# Altium PCB 3S_BMS_revised.PcbDoc
Units mm, origin at the board's own origin, x right, y up, seen from the top; angles counter-clockwise.
Board outline 30.73 x 42.55 mm, 2 copper layers (Top Layer, Bottom Layer); 27 components, 18 nets, 83 pads, 4 vias.
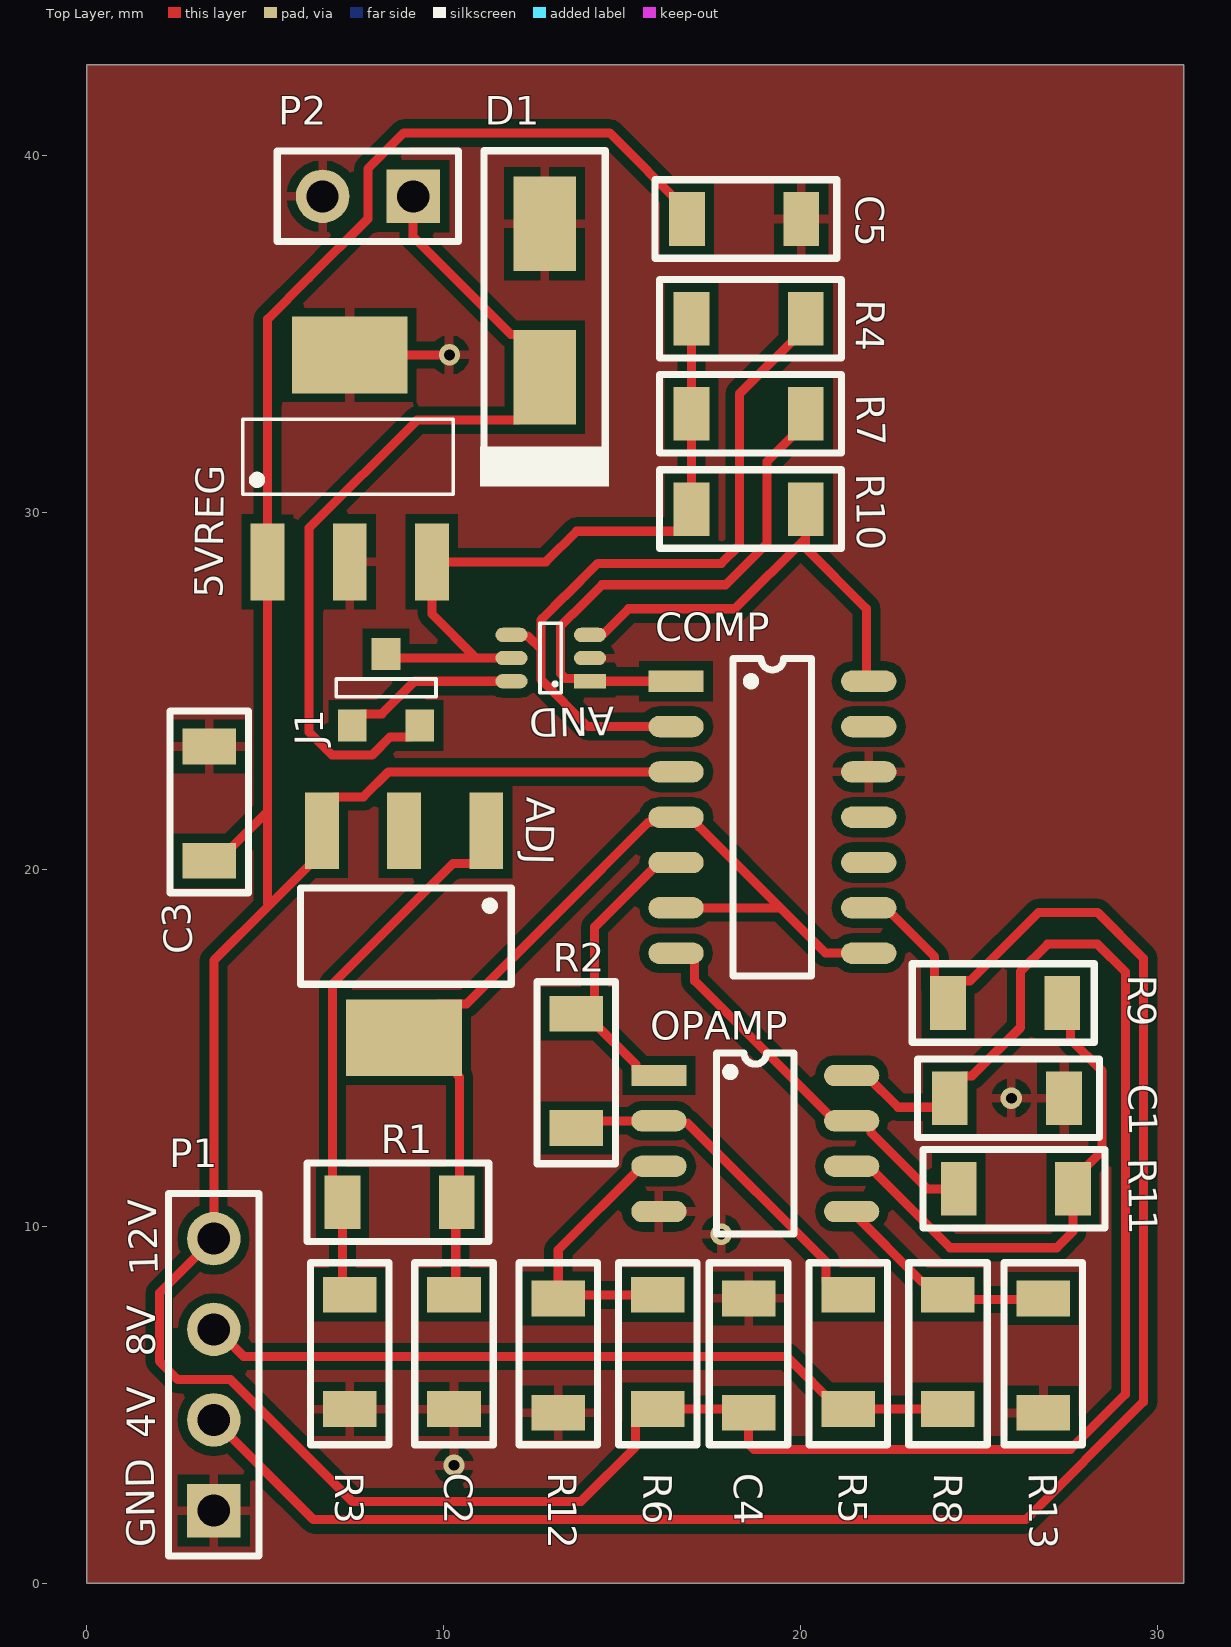
[diagram p0: Top Layer view]
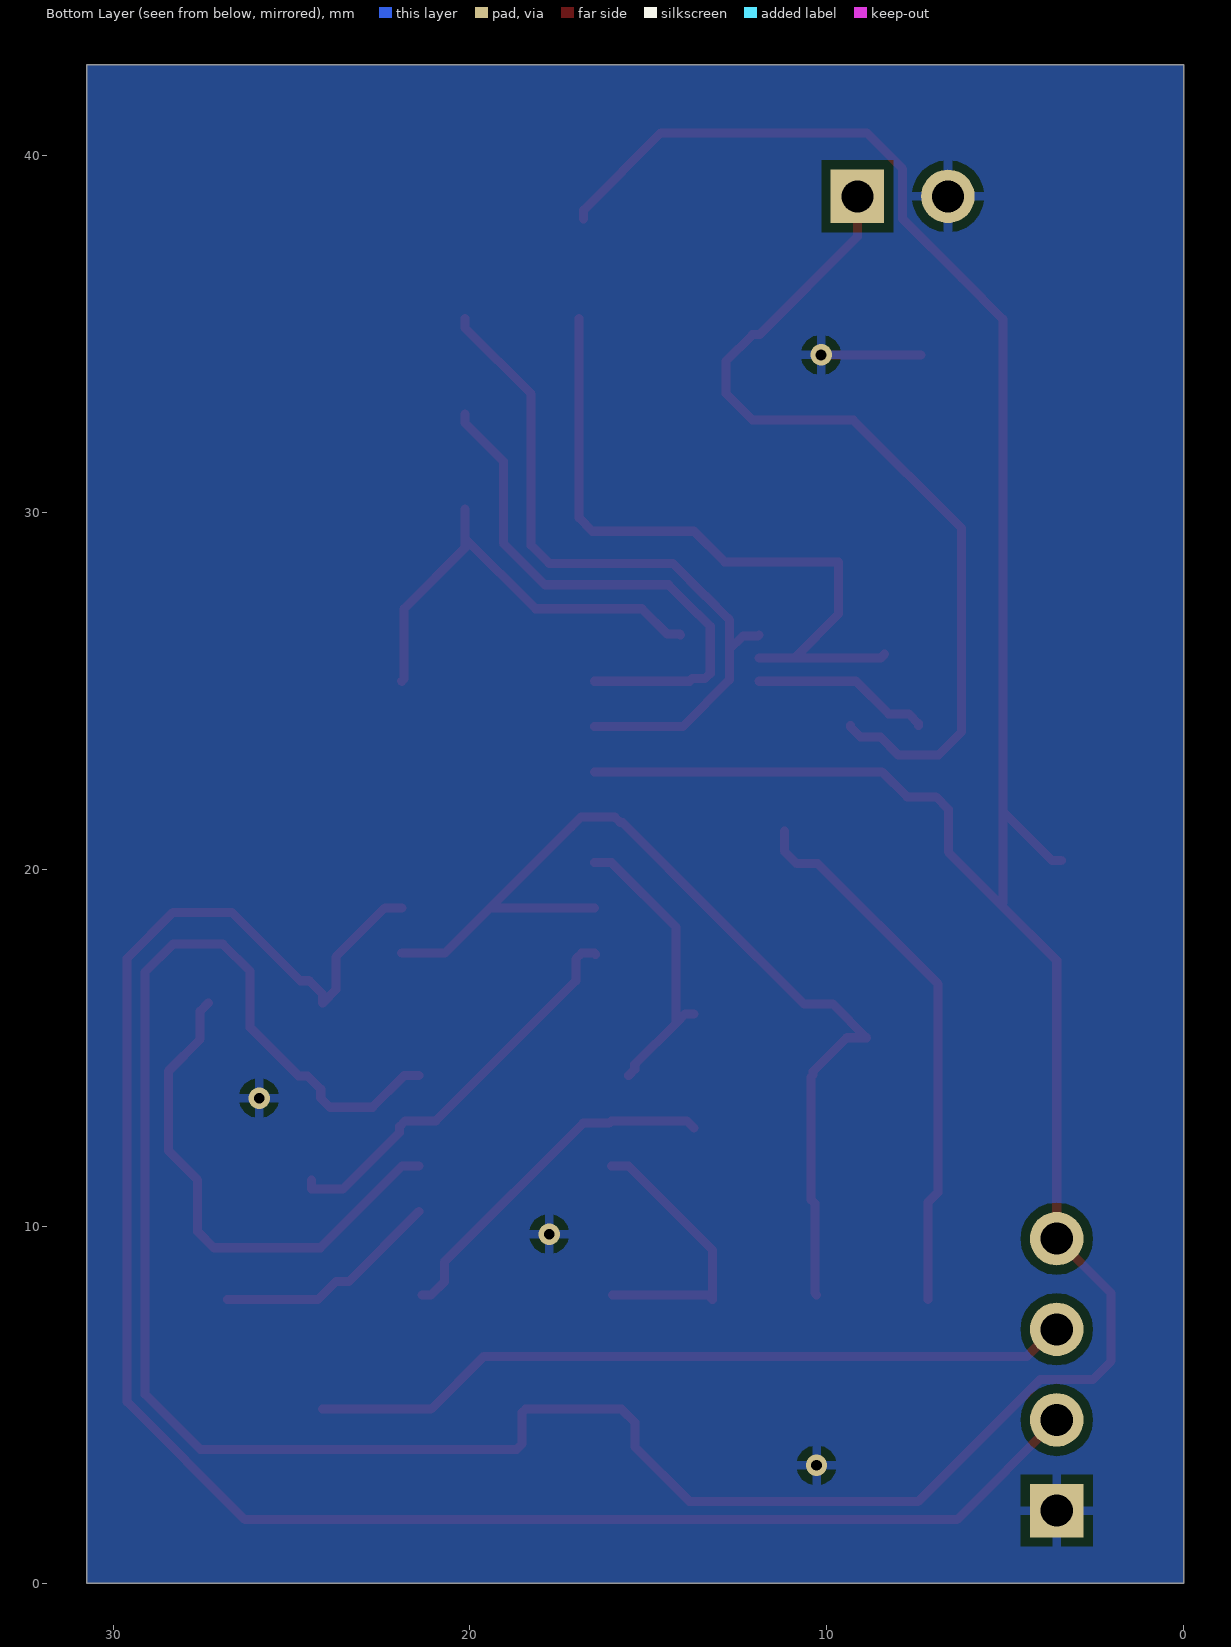
[diagram p1: Bottom Layer view, seen from below]
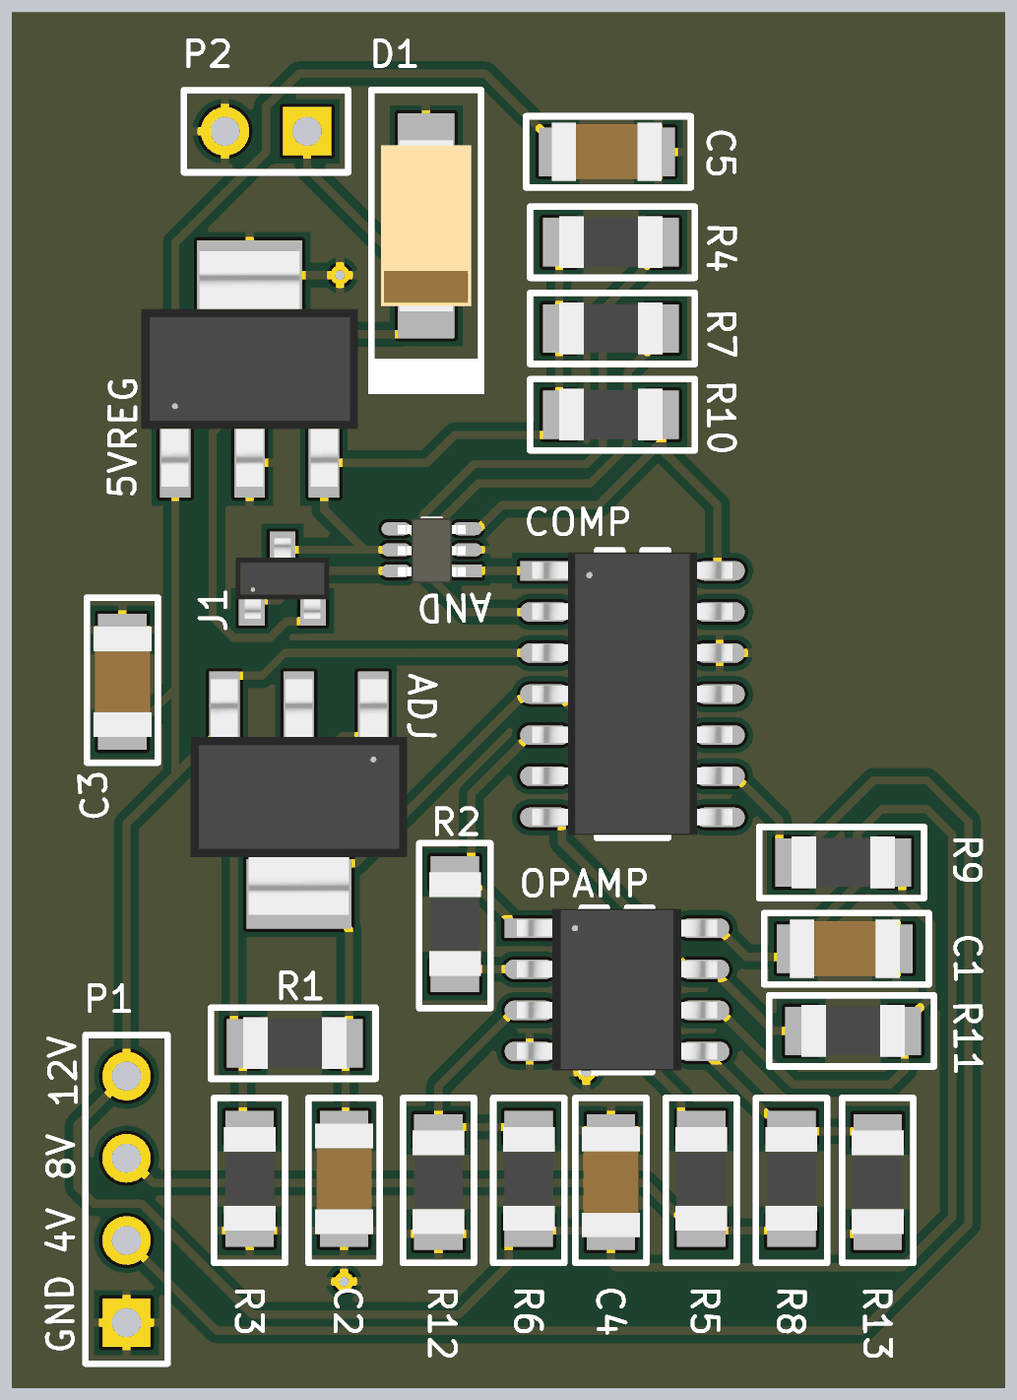
[diagram p2: 3D render of the assembled board from above, using the file's embedded part models]

## Layer stack, top to bottom
Top Solder: solder mask 0.0102, Solder Resist, Dk 3.5
Top Layer: signal copper 0.0356
Dielectric 1: dielectric 0.32, FR-4, Dk 4.8
Bottom Layer: signal copper 0.0356
Bottom Solder: solder mask 0.0102, Solder Resist, Dk 3.5

## Board outline
30.734,42.545 30.734,0 0,0 0,42.545

## Design rules (kind name [scope] priority, off if disabled: settings)
Clearance [All] p1: gap=0.254 ignorepadtopadclearanceinfootprint=FALSE except(0: Arc-Hole Track-Hole SMDPad-Hole THPad-Hole Via-Hole Fill-Hole Poly-Hole Region-Hole Text-Hole)
PolygonConnect [All] p1: connectstyle=Relief reliefconductorwidth=0.254 reliefentries=4 polygonreliefangle="90 Angle" airgapwidth=0.254
RoutingVias [All] p1: holewidth=0.711 width=1.27 viastyle="Through Hole" minholewidth=0.711 minwidth=1.27 maxholewidth=0.711 maxwidth=1.27
SolderMaskExpansion [All] p1: expansion=0.102 istentingtop=FALSE
Width [All] p1: maxlimit=0.254 minlimit=0.254 preferedwidth=0.254
30 further rules are at their usual default settings.

## Components (designator, comment, footprint, x,y, rotation, side; value= is the part's Value field where it differs from the comment)
5VREG "5V REG" 5VREG 7.366,28.617 r0 top
ADJ "ADJ REG" ADJREG 8.89,21.082 r180 top (schematic designator ADJ1)
AND "AND GATE" AND3 14.097,25.273 r180 top (schematic designator AND1)
C1 "0.1uF" C1206 25.781,13.589 r180 top
C2 "1uF" C1206 10.287,6.477 r90 top
C3 "0.1uF" C1206 3.429,21.844 r270 top
C4 "0.1uF" C1206 18.542,6.377 r270 top
C5 "0.1uF" C1206 18.415,38.227 r180 top
COMP "COMPARATOR" Comparator 16.51,25.273 r0 top (schematic designator COMP1)
D1 "Diode" Diode 12.827,35.941 r270 top
J1 "FET" MOSFET 8.382,26.035 r0 top
OPAMP "OP-AMP" "OPAMP 2-Circuit" 16.03,14.224 r0 top (schematic designator OPAMP1)
P1 "Header 4" HDR1X4 3.556,2.032 r90 top
P2 "Relay" HDR1X2 9.144,38.862 r180 top
R1 "330R" R1206 8.763,10.668 r0 top
R2 "1K" R1206 13.716,14.351 r90 top
R3 "620R" R1206 7.366,6.477 r90 top
R4 "47K" R1206 18.542,35.433 r180 top
R5 "1K" R1206 21.336,6.477 r90 top
R6 "1K" R1206 16.002,6.477 r90 top
R7 "47K" R1206 18.542,32.766 r180 top
R8 "1K" R1206 24.13,6.477 r90 top
R9 "1K" R1206 25.73,16.256 r0 top
R10 "47K" R1206 18.542,30.099 r180 top
R11 "1K" R1206 26.035,11.049 r0 top
R12 "1K" R1206 13.208,6.377 r270 top
R13 "1K" R1206 26.797,6.377 r270 top

## Footprints (in the part's own frame and the unit in brackets; to place one, negate y for a bottom-side part, rotate by r counter-clockwise, add the part's x,y. Pads: shape width x height; smd on the part's side, far side on the other; paste and mask are expansions set on the pad)
5VREG [mm]
  rect 0.95x2.15 smd: 1(-2.3,0) 2(0,0) 3(2.3,0)
  rect 3.25x2.15 smd: 4(0,5.8)
  silkscreen extent -3,1.9 2.9,4, body extent -3.35,-0.74 3.35,6.55, height 1.7
ADJREG [mm]
  rect 0.95x2.15 smd: 1(-2.3,0) 2(0,0) 3(2.3,0)
  rect 3.25x2.15 smd: 4(0,5.8)
  silkscreen extent -3,1.6 2.9,4.3, body extent -3.35,-0.84 3.35,6.45, height 1.7
AND3 [mm]
  rect 0.9x0.4 smd: 1(0,0)
  oval 0.9x0.4 smd: 2(0,-0.65) 3(0,-1.3) 4(2.2,-1.3) 5(2.2,-0.65) 6(2.2,0)
  silkscreen extent 0.8,-1.63 1.4,0.33, body extent 0.05,-1.62 2.15,0.38, height 1
C1206 [mm]
  rect 1x1.5 smd: 1(-1.6,0) 2(1.6,0)
  silkscreen extent -2.6,-1.1 2.5,1.1, body extent -1.7,-0.9 1.7,0.9, height 0.88
Comparator [mm]
  rect 1.55x0.6 smd: 1(0,0)
  oval 1.55x0.6 smd: 2(0,-1.27) 3(0,-2.54) 4(0,-3.81) 5(0,-5.08) 6(0,-6.35) 7(0,-7.62) 8(5.4,-7.62) 9(5.4,-6.35) 10(5.4,-5.08) 11(5.4,-3.81) 12(5.4,-2.54) 13(5.4,-1.27) 14(5.4,0)
  silkscreen extent 1.6,-8.25 3.8,0.64, body extent -0.4,-8.17 5.8,0.57, height 1.76
Diode [mm]
  rect 2.65x1.75 smd: 1(2.15,0) 2(-2.15,0)
  silkscreen extent -4.2,-1.8 5.2,1.8, body extent -2.64,-1.4 2.64,1.4, height 2.34
HDR1X2 [mm] "Connector; Header; 2 Position"
  rect 1.5x1.5 hole 0.9: 1(0,0)
  round 1.5 hole 0.9: 2(2.54,0)
  silkscreen extent -1.27,-1.27 3.81,1.27
HDR1X4 [mm] "Connector; Header; 4 Position"
  rect 1.5x1.5 hole 0.9: 1(0,0)
  round 1.5 hole 0.9: 2(2.54,0) 3(5.08,0) 4(7.62,0)
  silkscreen extent -1.27,-1.27 8.89,1.27
MOSFET [mm]
  rect 0.8x0.9 smd: 1(-0.95,-2) 2(0,0) 3(0.95,-2)
  silkscreen extent -1.4,-1.2 1.4,-0.7, body extent -1.45,-2.24 1.45,0.25, height 1.09
"OPAMP 2-Circuit" [mm]
  rect 1.55x0.6 smd: 1(0,0)
  oval 1.55x0.6 smd: 2(0,-1.27) 3(0,-2.54) 4(0,-3.81) 5(5.4,-3.81) 6(5.4,-2.54) 7(5.4,-1.27) 8(5.4,0)
  silkscreen extent 1.61,-4.44 3.79,0.64, body extent -0.4,-4.4 5.8,0.6, height 1.76
R1206 [mm]
  rect 1x1.5 smd: 1(-1.6,0) 2(1.6,0)
  silkscreen extent -2.6,-1.1 2.5,1.1, body extent -1.6,-0.8 1.6,0.8, height 0.71

## Part data
5VREG: library part LM7805MPX/NOPB, "IC REG LINEAR 5V 1.5A SOT223-4", Dropout Voltage=2V, Manufacturer="Texas Instruments", Max Operating Temperature=125°C, Min Operating Temperature=0°C, Quiescent Current=8mA, Supplier Part Number 1=296-44518-1-ND, Category="Voltage Regulators - Linear", Lead Free="Lead Free", Manufacturer Part Number=LM7805MPX/NOPB, Pricing 1="1=1.32000, 10=1.18000, 25=1.12000, 100=0.86000, 250=0.76000, 500=0.72000, 1000=0.56000 (USD)", RoHS=No, Stock 1=3420, Supplier 1=Digi-Key
ADJ: library part LM317DCYR, "TEXAS INSTRUMENTS - LM317DCYR - LINEAR VOLT REG, 1.5A, 1.25V-37V, SOT223", Case/Package=SOT-223, Dropout Voltage=2V, Manufacturer="Texas Instruments", Max Input Voltage=40V, Max Operating Temperature=125°C, Max Output Current=1.5A, Max Output Voltage=37V, Min Input Voltage=4.2V, Min Operating Temperature=0°C, Min Output Voltage=1.25V, Package Quantity=1, Power Supply Rejection Ratio (PSRR)=64dB, Quiescent Current=3.5mA, Reference Voltage=1.3V, Supplier Part Number 1=296-12602-1-ND, Category="Voltage Regulators - Linear", ComponentLink1Description=https://datasheet.ciiva.com/2042/lm317-2042144.pdf?src-supplier=Digi-Key, ComponentLink1URL=https://datasheet.ciiva.com/2042/lm317-2042144.pdf?src-supplier=Digi-Key, ComponentLink2Description=https://datasheet.ciiva.com/4882/slvs044u-120651-4882417.pdf?src-supplier=Mouser, ComponentLink2URL=https://datasheet.ciiva.com/4882/slvs044u-120651-4882417.pdf?src-supplier=Mouser, ComponentLink3Description=https://datasheet.ciiva.com/41458/001014031-da-01-en-ic-reg-adj-1-5a-lm317dcyr-sot-223-4-tid-41458183.pdf?src-supplier=Conrad, ComponentLink3URL=https://datasheet.ciiva.com/41458/001014031-da-01-en-ic-reg-adj-1-5a-lm317dcyr-sot-223-4-tid-41458183.pdf?src-supplier=Conrad, ComponentLink4Description=https://datasheet.ciiva.com/2042/lm317-2042145.pdf?src-supplier=Digi-Key, ComponentLink4URL=https://datasheet.ciiva.com/2042/lm317-2042145.pdf?src-supplier=Digi-Key, ComponentLink5Description=https://datasheet.ciiva.com/2042/lm317-2042146.pdf?src-supplier=Digi-Key, ComponentLink5URL=https://datasheet.ciiva.com/2042/lm317-2042146.pdf?src-supplier=Digi-Key, ComponentLink6Description=https://datasheet.ciiva.com/46385/1885815-46385689.pdf?src-supplier=Element14, ComponentLink6URL=https://datasheet.ciiva.com/46385/1885815-46385689.pdf?src-supplier=Element14, Contact Plating=Tin,Matte, Height=1.6mm, Lead Free="Lead Free", Length=6.5mm, Manufacturer Part Number=LM317DCYR, Mount="Surface Mount", Number of Outputs=1, Number of Pins=4, Number of Regulators=1, Output Current=1.5A, Output Type=Adjustable, Output Voltage=37V, Packaging="Tape and Reel", Polarity=Positive, Pricing 1="1=0.60000, 10=0.52800, 25=0.49600, 100=0.37600, 250=0.32000, 500=0.30400, 1000=0.23200 (USD)", Radiation Hardening=No, REACH SVHC="No SVHC", RoHS=Yes, Stock 1=100644, Supplier 1=Digi-Key, Weight=0.006632oz, Width=3.5mm
AND: library part SN74LVC1G11DCKR, "IC GATE AND 1CH 3-INP SC-70-6", Case/Package=SC, High Level Output Current=-32mA, Low Level Output Current=32mA, Manufacturer="Texas Instruments", Max Operating Temperature=125°C, Max Supply Voltage=5.5V, Min Operating Temperature=-40°C, Min Supply Voltage=1.65V, Package Quantity=1, Quiescent Current=10uA, Supplier Part Number 1=296-18066-1-ND, Category="Logic Gates", ComponentLink1Description=https://datasheet.ciiva.com/4216/901sn74lvc1g11-4216653.pdf?src-supplier=Arrow, ComponentLink1URL=https://datasheet.ciiva.com/4216/901sn74lvc1g11-4216653.pdf?src-supplier=Arrow, ComponentLink2Description=https://datasheet.ciiva.com/34301/756561-34301472.pdf?src-supplier=Jameco, ComponentLink2URL=https://datasheet.ciiva.com/34301/756561-34301472.pdf?src-supplier=Jameco, ComponentLink3Description=https://datasheet.ciiva.com/15090/getdatasheetpartid-173081-15090972.pdf?src-supplier=Verical, ComponentLink3URL=https://datasheet.ciiva.com/15090/getdatasheetpartid-173081-15090972.pdf?src-supplier=Verical, ComponentLink4Description=https://datasheet.ciiva.com/14290/sn74lvc1g11-14290749.pdf?src-supplier=Avnet, ComponentLink4URL=https://datasheet.ciiva.com/14290/sn74lvc1g11-14290749.pdf?src-supplier=Avnet, ComponentLink5Description=https://datasheet.ciiva.com/1864/sn74lvc1g11-1864149.pdf?src-supplier=Digi-Key, ComponentLink5URL=https://datasheet.ciiva.com/1864/sn74lvc1g11-1864149.pdf?src-supplier=Digi-Key, ComponentLink6Description=https://datasheet.ciiva.com/1864/sn74lvc1g11-1864150.pdf?src-supplier=Digi-Key, ComponentLink6URL=https://datasheet.ciiva.com/1864/sn74lvc1g11-1864150.pdf?src-supplier=Digi-Key, ComponentLink7Description=https://datasheet.ciiva.com/1864/sn74lvc1g11-1864151.pdf?src-supplier=Digi-Key, ComponentLink7URL=https://datasheet.ciiva.com/1864/sn74lvc1g11-1864151.pdf?src-supplier=Digi-Key, ComponentLink8Description=https://datasheet.ciiva.com/26218/sn74lvc1g11-26218392.pdf?src-supplier=Avnet+Europe, ComponentLink8URL=https://datasheet.ciiva.com/26218/sn74lvc1g11-26218392.pdf?src-supplier=Avnet+Europe, ComponentLink9Description=https://datasheet.ciiva.com/7783/sn74lvc1g11-7783449.pdf?src-supplier=Element14, ComponentLink9URL=https://datasheet.ciiva.com/7783/sn74lvc1g11-7783449.pdf?src-supplier=Element14, ComponentLink10Description=https://datasheet.ciiva.com/28695/1882071-28695898.pdf?src-supplier=Element14, ComponentLink10URL=https://datasheet.ciiva.com/28695/1882071-28695898.pdf?src-supplier=Element14, ComponentLink11Description=https://datasheet.ciiva.com/46439/1856273-46439162.pdf?src-supplier=Element14, ComponentLink11URL=https://datasheet.ciiva.com/46439/1856273-46439162.pdf?src-supplier=Element14, ComponentLink12Description=https://datasheet.ciiva.com/46439/1856273-46439210.pdf?src-supplier=Element14, ComponentLink12URL=https://datasheet.ciiva.com/46439/1856273-46439210.pdf?src-supplier=Element14, Contact Plating=Gold, Height=0.9mm, Lead Free="Lead Free", Length=2mm, Logic Function=AND, Manufacturer Part Number=SN74LVC1G11DCKR, Mount="Surface Mount", Number of Bits=1, Number of Circuits=1, Number of Elements=1, Number of Gates=1, Number of Input Lines=3, Number of Inputs=3, Number of Output Lines=1, Number of Outputs=1, Number of Pins=6, Output Current=32mA, Packaging="Tape and Reel", Pricing 1="1=0.43000, 10=0.32000, 25=0.28000, 100=0.18120, 250=0.15000, 500=0.12000, 1000=0.09200 (USD)", Propagation Delay=3.5ns, Radiation Hardening=No, REACH SVHC="No SVHC", RoHS=Yes, Schmitt Trigger Input=No, Stock 1=75205, Supplier 1=Digi-Key, Turn-On Delay Time=4.9ns, Weight=8.8E-05oz, Width=1.25mm
C1 C3 C4 C5: library part C1206C104K5RAC-TU, "Kemet 0.1µF ±10% 50V dc X7R Dielectric SMD Ceramic Multilayer Capacitor; 1206 pa", Capacitance=100nF, Case Code (Imperial)=1206, Case Code (Metric)=3216, Dielectric=X7R, Dielectric Material=Ceramic, Manufacturer=KEMET, Max Operating Temperature=125°C, Min Operating Temperature=-55°C, Package Quantity=4000, Supplier Part Number 1=399-C1206C104K5RAC7800CT-ND, Tolerance=10%, Voltage=50V, Case/Package=1206, Category="Ceramic Capacitors", ComponentLink1Description=https://datasheet.ciiva.com/6125/1725438-6125494.pdf?src-supplier=Farnell, ComponentLink1URL=https://datasheet.ciiva.com/6125/1725438-6125494.pdf?src-supplier=Farnell, ComponentLink2Description=https://datasheet.ciiva.com/6125/kem-c1002-x7r-smd-6125493.pdf?src-supplier=Farnell, ComponentLink2URL=https://datasheet.ciiva.com/6125/kem-c1002-x7r-smd-6125493.pdf?src-supplier=Farnell, ComponentLink3Description=https://datasheet.ciiva.com/14584/70095383-14584998.pdf?src-supplier=Allied+Electronics, ComponentLink3URL=https://datasheet.ciiva.com/14584/70095383-14584998.pdf?src-supplier=Allied+Electronics, ComponentLink4Description=https://datasheet.ciiva.com/6094/kem-c1002-x7r-smd-6094137.pdf?src-supplier=Farnell, ComponentLink4URL=https://datasheet.ciiva.com/6094/kem-c1002-x7r-smd-6094137.pdf?src-supplier=Farnell, ComponentLink5Description=https://datasheet.ciiva.com/14589/70095383-14589050.pdf?src-supplier=Allied+Electronics, ComponentLink5URL=https://datasheet.ciiva.com/14589/70095383-14589050.pdf?src-supplier=Allied+Electronics, ComponentLink6Description=https://datasheet.ciiva.com/7729/1851736-7729804.pdf?src-supplier=Element14, ComponentLink6URL=https://datasheet.ciiva.com/7729/1851736-7729804.pdf?src-supplier=Element14, ComponentLink7Description=https://datasheet.ciiva.com/7730/kem-c1002-x7r-smd-7730076.pdf?src-supplier=Element14, ComponentLink7URL=https://datasheet.ciiva.com/7730/kem-c1002-x7r-smd-7730076.pdf?src-supplier=Element14, ComponentLink8Description=https://datasheet.ciiva.com/7729/1851736-7729805.pdf?src-supplier=Element14, ComponentLink8URL=https://datasheet.ciiva.com/7729/1851736-7729805.pdf?src-supplier=Element14, ComponentLink9Description=https://datasheet.ciiva.com/7730/kem-c1002-x7r-smd-7730077.pdf?src-supplier=Element14, ComponentLink9URL=https://datasheet.ciiva.com/7730/kem-c1002-x7r-smd-7730077.pdf?src-supplier=Element14, ComponentLink10Description=https://datasheet.ciiva.com/32426/slceramic-chip-condensers-e-32426463.pdf?src-supplier=Distrelec, ComponentLink10URL=https://datasheet.ciiva.com/32426/slceramic-chip-condensers-e-32426463.pdf?src-supplier=Distrelec, ComponentLink11Description=https://datasheet.ciiva.com/5423/kem-c1002-x7r-smd-5423254.pdf?src-supplier=Mouser, ComponentLink11URL=https://datasheet.ciiva.com/5423/kem-c1002-x7r-smd-5423254.pdf?src-supplier=Mouser, ComponentLink12Description=https://datasheet.ciiva.com/28682/1851736-28682249.pdf?src-supplier=Element14, ComponentLink12URL=https://datasheet.ciiva.com/28682/1851736-28682249.pdf?src-supplier=Element14, Contact Plating=Tin,Matte, Depth=1.6mm, Height=0.78mm, Length=3.2mm, Manufacturer Part Number=C1206C104K5RAC-TU, Mount="Surface Mount", Number of Pins=2, Packaging="Tape and Reel", Pricing 1="1=0.12000, 10=0.08400, 50=0.04760, 100=0.03950, 500=0.02768, 1000=0.02291 (USD)", Radiation Hardening=No, REACH SVHC="No SVHC", RoHS=Yes, Stock 1=1706426, Supplier 1=Digi-Key, Termination=SMD/SMT, Voltage Rating=50V, Voltage Rating (DC)=50V, Width=1.6mm
C2: library part C1206C105M4RACTU, "KEMET         C1206C105M4RACTU             SMD Multilayer Ceramic Capacitor, 1206 [3216 Metric], 1 F, 16 V,  20%, X7R, C Series                          New", Case Code (Imperial)=1206, Case Code (Metric)=3216, Dielectric=X7R, Dielectric Material=Ceramic, Manufacturer=KEMET, Max Operating Temperature=125°C, Min Operating Temperature=-55°C, Package Quantity=1, Supplier Part Number 1=399-8150-1-ND, Tolerance=20%, Voltage Rating=16V, Capacitance=1uF, Case/Package=1206, Category="Ceramic Capacitors", ComponentLink1Description=http://components.arrow.com/part/dataview/0323_00341530?src-supplier=Arrow+Europe, ComponentLink1URL=http://components.arrow.com/part/dataview/0323_00341530?src-supplier=Arrow+Europe, ComponentLink2Description=http://www.farnell.com/datasheets/2746114.pdf?src-supplier=Farnell, ComponentLink2URL=http://www.farnell.com/datasheets/2746114.pdf?src-supplier=Farnell, ComponentLink3Description=http://www.mouser.com/ds/2/212/KEM_C1002_X7R_SMD-1102033.pdf?src-supplier=Mouser, ComponentLink3URL=http://www.mouser.com/ds/2/212/KEM_C1002_X7R_SMD-1102033.pdf?src-supplier=Mouser, ComponentLink4Description=http://www.farnell.com/datasheets/2746114.pdf?src-supplier=Newark, ComponentLink4URL=http://www.farnell.com/datasheets/2746114.pdf?src-supplier=Newark, ComponentLink5Description=http://www.farnell.com/datasheets/1828800.pdf?src-supplier=Newark, ComponentLink5URL=http://www.farnell.com/datasheets/1828800.pdf?src-supplier=Newark, ComponentLink6Description=https://api.kemet.com/component-edge/download/datasheet/C1206C105M4RACTU.pdf?src-supplier=Digi-Key, ComponentLink6URL=https://api.kemet.com/component-edge/download/datasheet/C1206C105M4RACTU.pdf?src-supplier=Digi-Key, ComponentLink7Description=http://components.arrow.com/part/dataview/2096582S3494707N7429?src-supplier=Arrow, ComponentLink7URL=http://components.arrow.com/part/dataview/2096582S3494707N7429?src-supplier=Arrow, ComponentLink8Description=https://search.kemet.com/component-edge/download/datasheet/C1206C105M4RACTU.pdf?src-supplier=Digi-Key, ComponentLink8URL=https://search.kemet.com/component-edge/download/datasheet/C1206C105M4RACTU.pdf?src-supplier=Digi-Key, ComponentLink9Description=https://www.verical.com/server-webapp/html/getDatasheet?partID=110809&src-supplier=Verical, ComponentLink9URL=https://www.verical.com/server-webapp/html/getDatasheet?partID=110809&src-supplier=Verical, ComponentLink10Description=http://www.farnell.com/datasheets/2065007.pdf?src-supplier=Element14, ComponentLink10URL=http://www.farnell.com/datasheets/2065007.pdf?src-supplier=Element14, Depth=1.6mm, Height=1.2mm, Length=3.2mm, Manufacturer Part Number=C1206C105M4RACTU, Mount="Surface Mount", Packaging="Tape and Reel", Pricing 1="1=0.19000, 10=0.12600, 50=0.07560, 100=0.06390, 500=0.04372, 1000=0.03868 (USD)", Radiation Hardening=No, REACH SVHC="No SVHC", RoHS=Yes, Stock 1=36978, Supplier 1=Digi-Key, Termination=SMD/SMT, Thickness=0.055inch, Voltage Rating (DC)=16V, Width=0.063inch
COMP: library part LM339DR, "Comparator Quad 15V/30V 14-Pin SOIC T/R", Case/Package=SOIC, Input Bias Current=250nA, Input Offset Voltage (Vos)=5mV, Manufacturer="Texas Instruments", Max Dual Supply Voltage=15V, Max Operating Temperature=70°C, Max Supply Current=500uA, Max Supply Voltage=30V, Min Dual Supply Voltage=1V, Min Operating Temperature=0°C, Min Supply Voltage=2V, Nominal Supply Current=2mA, Output Current=20mA, Output Current per Channel=6mA, Package Quantity=2500, Quiescent Current=2.5mA, Supplier Part Number 1=296-1013-1-ND, Voltage Gain=106.02dB, Category="Amplifiers - Op Amps, Buffer, Instrumentation", ComponentLink1Description=https://datasheet.ciiva.com/15131/getdatasheetpartid-242797-15131064.pdf?src-supplier=Verical, ComponentLink1URL=https://datasheet.ciiva.com/15131/getdatasheetpartid-242797-15131064.pdf?src-supplier=Verical, ComponentLink2Description=https://datasheet.ciiva.com/34301/902741-34301710.pdf?src-supplier=Jameco, ComponentLink2URL=https://datasheet.ciiva.com/34301/902741-34301710.pdf?src-supplier=Jameco, ComponentLink3Description=https://datasheet.ciiva.com/2970/lm2901-2970486.pdf?src-supplier=Avnet, ComponentLink3URL=https://datasheet.ciiva.com/2970/lm2901-2970486.pdf?src-supplier=Avnet, ComponentLink4Description=https://datasheet.ciiva.com/2970/lm2901-2970487.pdf?src-supplier=Avnet, ComponentLink4URL=https://datasheet.ciiva.com/2970/lm2901-2970487.pdf?src-supplier=Avnet, ComponentLink5Description=https://datasheet.ciiva.com/46390/1874704-46390521.pdf?src-supplier=Element14, ComponentLink5URL=https://datasheet.ciiva.com/46390/1874704-46390521.pdf?src-supplier=Element14, ComponentLink6Description=https://datasheet.ciiva.com/1483/1633630-1483053.pdf?src-supplier=Element14, ComponentLink6URL=https://datasheet.ciiva.com/1483/1633630-1483053.pdf?src-supplier=Element14, ComponentLink7Description=https://datasheet.ciiva.com/1827/lm139a-1827181.pdf?src-supplier=Digi-Key, ComponentLink7URL=https://datasheet.ciiva.com/1827/lm139a-1827181.pdf?src-supplier=Digi-Key, ComponentLink8Description=https://datasheet.ciiva.com/1827/lm139a-1827182.pdf?src-supplier=Digi-Key, ComponentLink8URL=https://datasheet.ciiva.com/1827/lm139a-1827182.pdf?src-supplier=Digi-Key, ComponentLink9Description=https://datasheet.ciiva.com/1827/lm139a-1827183.pdf?src-supplier=Digi-Key, ComponentLink9URL=https://datasheet.ciiva.com/1827/lm139a-1827183.pdf?src-supplier=Digi-Key, ComponentLink10Description=https://datasheet.ciiva.com/16464/lm2901-16464303.pdf?src-supplier=Avnet+Asia, ComponentLink10URL=https://datasheet.ciiva.com/16464/lm2901-16464303.pdf?src-supplier=Avnet+Asia, ComponentLink11Description=https://datasheet.ciiva.com/48711/001072944-da-01-en-ic-quad-diff-comp-lm339dr-soic-14-tid-48711414.pdf?src-supplier=Conrad, ComponentLink11URL=https://datasheet.ciiva.com/48711/001072944-da-01-en-ic-quad-diff-comp-lm339dr-soic-14-tid-48711414.pdf?src-supplier=Conrad, Contact Plating=Gold, Lead Free="Lead Free", Manufacturer Part Number=LM339DR, Max Input Current=250nA, Mount="Surface Mount", Number of Channels=4, Number of Elements=4, Number of Pins=14, Output Type=TTL, Packaging="Tape and Reel", Pricing 1="1=0.38000, 10=0.28700, 25=0.25840, 100=0.14100, 250=0.13632, 500=0.12220, 1000=0.09400 (USD)", Radiation Hardening=No, REACH SVHC="No SVHC", Response Time=1.3us, RoHS=Yes, Stock 1=39253, Supplier 1=Digi-Key, Weight=0.004318oz
D1: library part S1B, "ON SEMICONDUCTOR - S1B - Standard Recovery Diode, General Purpose, 100 V, 1 A, Single, 1.1 V, 1.8 µs, 30 A", Average Rectified Current=1A, Capacitance=12pF, Case/Package=SMA, Forward Voltage=1.1V, Manufacturer="ON Semiconductor / Fairchild", Max Forward Surge Current (Ifsm)=30A, Max Operating Temperature=150°C, Max Repetitive Reverse Voltage (Vrrm)=100V, Max Surge Current=40A, Min Operating Temperature=-55°C, Package Quantity=1, Peak Reverse Current=1uA, Power Dissipation=1.4W, Supplier Part Number 1=S1BFSCT-ND, Category="Rectifier Diodes", ComponentLink1Description=https://datasheet.ciiva.com/4452/s1b-196602-4452914.pdf?src-supplier=Mouser, ComponentLink1URL=https://datasheet.ciiva.com/4452/s1b-196602-4452914.pdf?src-supplier=Mouser, ComponentLink2Description=https://datasheet.ciiva.com/25624/0900766b810e25be-25624908.pdf?src-supplier=RSComponents, ComponentLink2URL=https://datasheet.ciiva.com/25624/0900766b810e25be-25624908.pdf?src-supplier=RSComponents, ComponentLink3Description=https://datasheet.ciiva.com/916/s1a-916901.pdf?src-supplier=Digi-Key, ComponentLink3URL=https://datasheet.ciiva.com/916/s1a-916901.pdf?src-supplier=Digi-Key, ComponentLink4Description=https://datasheet.ciiva.com/916/s1a-916902.pdf?src-supplier=Digi-Key, ComponentLink4URL=https://datasheet.ciiva.com/916/s1a-916902.pdf?src-supplier=Digi-Key, ComponentLink5Description=https://datasheet.ciiva.com/916/s1a-916903.pdf?src-supplier=Digi-Key, ComponentLink5URL=https://datasheet.ciiva.com/916/s1a-916903.pdf?src-supplier=Digi-Key, Contact Plating=Tin,Matte, Current Rating=1A, Element Configuration=Single, Forward Current=1A, Height=2.2mm, Lead Free="Lead Free", Length=4.75mm, Manufacturer Part Number=S1B, Max Reverse Voltage (DC)=100V, Mount="Surface Mount", Number of Pins=2, Output Current=1A, Packaging="Tape and Reel", Peak Non-Repetitive Surge Current=30A, Polarity=Standard, Pricing 1="1=0.24000, 10=0.19200, 25=0.16120, 100=0.07880, 500=0.06570, 1000=0.04565, 2500=0.04242 (USD)", Radiation Hardening=No, REACH SVHC="No SVHC", Recovery Time=1800ns, Reverse Recovery Time=1.8us, Reverse Voltage=100V, RoHS=Yes, Stock 1=104255, Supplier 1=Digi-Key, Voltage Rating (DC)=100V, Weight=0.106g, Width=2.95mm
J1: library part DMN65D8L-7, "N-Channel Enhancement MOSFET SOT-23", Case/Package=SOT-23, Continuous Drain Current (ID)=310mA, Drain to Source Breakdown Voltage=60V, Drain to Source Resistance=2R, Gate to Source Voltage (Vgs)=20V, Input Capacitance=22pF, Manufacturer=Diodes, Max Operating Temperature=150°C, Max Power Dissipation=370mW, Min Operating Temperature=-55°C, Package Quantity=1, Power Dissipation=540mW, Supplier Part Number 1=DMN65D8L-7DICT-ND, Threshold Voltage=2V, Category=MOSFETs, ComponentLink1Description=https://datasheet.ciiva.com/6371/dmn65d8l-6371124.pdf?src-supplier=Digi-Key, ComponentLink1URL=https://datasheet.ciiva.com/6371/dmn65d8l-6371124.pdf?src-supplier=Digi-Key, ComponentLink2Description=https://datasheet.ciiva.com/13058/dmn65d8l-219098-13058455.pdf?src-supplier=Mouser, ComponentLink2URL=https://datasheet.ciiva.com/13058/dmn65d8l-219098-13058455.pdf?src-supplier=Mouser, ComponentLink3Description=https://datasheet.ciiva.com/6371/dmn65d8l-6371126.pdf?src-supplier=Digi-Key, ComponentLink3URL=https://datasheet.ciiva.com/6371/dmn65d8l-6371126.pdf?src-supplier=Digi-Key, ComponentLink4Description=https://datasheet.ciiva.com/6371/dmn65d8l-6371128.pdf?src-supplier=Digi-Key, ComponentLink4URL=https://datasheet.ciiva.com/6371/dmn65d8l-6371128.pdf?src-supplier=Digi-Key, Drain to Source Voltage (Vdss)=60V, Element Configuration=Single, FET Type="1 N-Channel", Height=1.1mm, Lead Free="Lead Free", Length=3mm, Manufacturer Part Number=DMN65D8L-7, Mount="Surface Mount", Number of Channels=1, Number of Elements=1, Number of Pins=3, Packaging="Tape and Reel", Pricing 1="1=0.17000, 10=0.15100, 25=0.14400, 100=0.06330, 250=0.06076, 500=0.04972, 1000=0.03453 (USD)", Rds On Max=3R, REACH SVHC="No SVHC", Rise Time=2.8ns, RoHS=Yes, Stock 1=514497, Supplier 1=Digi-Key, Turn-Off Delay Time=12.6ns, Turn-On Delay Time=2.7ns, Weight=0.000282oz, Width=1.4mm
OPAMP: library part LMC662AIMX/NOPB, "TEXAS INSTRUMENTS   LMC662AIMX/NOPB   OP-AMP, 1.4MHZ, 1.1V/US, SOIC-8", Case/Package=SOIC, Input Offset Voltage (Vos)=3mV, Manufacturer="Texas Instruments", Max Operating Temperature=85°C, Max Supply Voltage=15.5V, Min Operating Temperature=-40°C, Min Supply Voltage=4.75V, Output Current=21mA, Power Supply Rejection Ratio (PSRR)=70dB, Supplier Part Number 1=LMC662AIMX/NOPBCT-ND, Voltage Gain=126.02dB, Bandwidth=1.4MHz, Category="Amplifiers - Op Amps, Buffer, Instrumentation", Common Mode Rejection Ratio=70dB, ComponentLink1Description=http://components.arrow.com/part/dataview/53774360S9849188N1317?src-supplier=Arrow, ComponentLink1URL=http://components.arrow.com/part/dataview/53774360S9849188N1317?src-supplier=Arrow, ComponentLink2Description=http://components.arrow.com/part/dataview/0323_00059640?src-supplier=Arrow+Europe, ComponentLink2URL=http://components.arrow.com/part/dataview/0323_00059640?src-supplier=Arrow+Europe, ComponentLink3Description=http://www.ti.com/general/docs/lit/getliterature.tsp?genericPartNumber=LMC662&&fileType=pdf&src-supplier=Avnet, ComponentLink3URL=http://www.ti.com/general/docs/lit/getliterature.tsp?genericPartNumber=LMC662&&fileType=pdf&src-supplier=Avnet, ComponentLink4Description=http://www.ti.com/lit/ds/symlink/lmc662.pdf?src-supplier=Digi-Key, ComponentLink4URL=http://www.ti.com/lit/ds/symlink/lmc662.pdf?src-supplier=Digi-Key, ComponentLink5Description=http://www.farnell.com/datasheets/1839249.pdf?src-supplier=Element14, ComponentLink5URL=http://www.farnell.com/datasheets/1839249.pdf?src-supplier=Element14, ComponentLink6Description=http://www.ti.com/general/docs/lit/getliterature.tsp?genericPartNumber=LMC662&&fileType=pdf&src-supplier=Farnell, ComponentLink6URL=http://www.ti.com/general/docs/lit/getliterature.tsp?genericPartNumber=LMC662&&fileType=pdf&src-supplier=Farnell, ComponentLink7Description=http://www.ti.com/litv/SNOSC51B?src-supplier=Mouser, ComponentLink7URL=http://www.ti.com/litv/SNOSC51B?src-supplier=Mouser, ComponentLink8Description=http://www.ti.com/general/docs/suppproductinfo.tsp?distId=10&amp;gotoUrl=http%3A%2F%2Fwww.ti.com%2Flit%2Fgpn%2Flmc662&src-supplier=Digi-Key, ComponentLink8URL=http://www.ti.com/general/docs/suppproductinfo.tsp?distId=10&amp;gotoUrl=http%3A%2F%2Fwww.ti.com%2Flit%2Fgpn%2Flmc662&src-supplier=Digi-Key, ComponentLink9Description=http://www.farnell.com/datasheets/1888942.pdf?src-supplier=Element14, ComponentLink9URL=http://www.farnell.com/datasheets/1888942.pdf?src-supplier=Element14, Gain Bandwidth Product=1.4MHz, Lead Free="Lead Free", Manufacturer Part Number=LMC662AIMX/NOPB, Mount="Surface Mount", Number of Amplifiers=2, Number of Channels=2, Number of Circuits=2, Number of Elements=2, Number of Pins=8, Packaging="Tape and Reel", Pricing 1="1=1.73000, 10=1.55600, 25=1.46760, 100=1.17400, 250=1.02724, 500=0.99790, 1000=0.79245 (USD)", REACH SVHC="No SVHC", RoHS=Yes, Slew Rate=1.1V/µs, Stock 1=33461, Supplier 1=Digi-Key, Unity Gain Bandwidth Product=1.4MHz
P1: "Header, 4-Pin", LatestRevisionDate=17-Jul-2002, LatestRevisionNote="Re-released for DXP Platform.", Publisher="Altium Limited"
P2: library part 22-29-2021, "Conn Wire to Board HDR 2 POS 2.54mm Solder ST Thru-Hole Bag", Color=White, Flammability Rating="UL94 V-0", Insulation Color=Natural, Manufacturer=Molex, Max Operating Temperature=80°C, Supplier Part Number 1=WM2744-ND, Voltage Rating (DC)=250V, Category=Connectors, ComponentLink1Description=https://datasheet.ciiva.com/70131/022292021-sd-70131706.pdf?src-supplier=Digi-Key, ComponentLink1URL=https://datasheet.ciiva.com/70131/022292021-sd-70131706.pdf?src-supplier=Digi-Key, Connector Type="Header,Male Pin", Contact Material=Brass, Contact Mating Length=0.295inch, Contact Plating=Gold, Contact Post Length=0.14inch, Contact Shape=Square, Fastening Type=Friction, Gender=Male, Glow Wire Compliant=Non-compliant, Halogen Free="Low Halogen", Insulation Height=0.461inch, Insulation Material=Nylon, Lead Free="Lead Free", Manufacturer Part Number=22-29-2021, Mount="Through Hole", Number of Positions=2, Number of Rows=1, Packaging=Bag, Pricing 1="1=0.48000, 10=0.45200, 100=0.31630, 500=0.27112, 1000=0.22593, 5000=0.19365, 10000=0.18074 (USD)", RoHS=Yes, Stock 1=6742, Supplier 1=Digi-Key, Termination=Solder
R1: library part RC1206FR-07330RL, "Surface Mount Thick Film Resistor, RC Series, 330 ohm, 250 mW, - 1%, 200 V, 1206 [3216 Metric]", Case Code (Imperial)=1206, Case Code (Metric)=3216, Manufacturer=Yageo, Max Operating Temperature=155°C, Min Operating Temperature=-55°C, Power Rating=250mW, Supplier Part Number 1=311-330FRCT-ND, Temperature Coefficient=100ppm/°C, Tolerance=1%, Voltage Rating=200V, Case/Package=1206, Category="Chip SMD Resistors", ComponentLink1Description=https://datasheet.ciiva.com/11819/0900766b80c6630a-11819921.pdf?src-supplier=RSComponents, ComponentLink1URL=https://datasheet.ciiva.com/11819/0900766b80c6630a-11819921.pdf?src-supplier=RSComponents, ComponentLink2Description=https://datasheet.ciiva.com/17422/pyu-rc1206-51-rohs-l-4-17422588.pdf?src-supplier=Future+Electronics, ComponentLink2URL=https://datasheet.ciiva.com/17422/pyu-rc1206-51-rohs-l-4-17422588.pdf?src-supplier=Future+Electronics, Composition="Thick Film", Depth=1.6mm, Height=0.55mm, Lead Free="Lead Free", Length=3.1mm, Manufacturer Part Number=RC1206FR-07330RL, Packaging="Tape and Reel", Pricing 1="1=0.10000, 10=0.06900, 100=0.02800, 1000=0.01259, 2500=0.01092 (USD)", REACH SVHC=Unknown, Resistance=330R, RoHS=Yes, Stock 1=22261, Supplier 1=Digi-Key, Termination=SMD/SMT
R2 R5 R6 R8 R9 R11 R12 R13: library part RC1206JR-071KL, "RES SMD 1K OHM 5% 1/4W 1206", Case Code (Imperial)=1206, Case Code (Metric)=3216, Manufacturer=Yageo, Max Operating Temperature=155°C, Max Power Dissipation=250mW, Min Operating Temperature=-55°C, Package Quantity=1, Resistance=1kR, Supplier Part Number 1=311-1.0KERDKR-ND, Temperature Coefficient=100ppm/°C, Tolerance=5%, Voltage Rating=200V, Case/Package=1206, Category="Chip SMD Resistors", ComponentLink1Description=https://datasheet.ciiva.com/2458/pyu-r-int-thick-7-2458672.pdf?src-supplier=Digi-Key, ComponentLink1URL=https://datasheet.ciiva.com/2458/pyu-r-int-thick-7-2458672.pdf?src-supplier=Digi-Key, ComponentLink2Description=https://datasheet.ciiva.com/2458/pyu-r-int-thick-7-2458673.pdf?src-supplier=Digi-Key, ComponentLink2URL=https://datasheet.ciiva.com/2458/pyu-r-int-thick-7-2458673.pdf?src-supplier=Digi-Key, ComponentLink3Description=https://datasheet.ciiva.com/2458/pyu-r-int-thick-7-2458671.pdf?src-supplier=Digi-Key, ComponentLink3URL=https://datasheet.ciiva.com/2458/pyu-r-int-thick-7-2458671.pdf?src-supplier=Digi-Key, Composition="Thick Film", Depth=1.6mm, Height=0.026inch, Lead Free="Lead Free", Length=3.1mm, Manufacturer Part Number=RC1206JR-071KL, Military Standard=Not, Number of Terminations=2, Packaging="Tape and Reel", Power Rating=250mW, Pricing 1="1=0.10000, 10=0.05900, 100=0.02400, 1000=0.01079, 2500=0.00936 (USD)", REACH SVHC=Unknown, RoHS=Yes, Stock 1=2065133, Supplier 1=Digi-Key, Termination=SMD/SMT, Width=0.063inch
R3: library part RMCF1206JT620R, "Res Thick Film 1206 620 Ohm 5% 1/4W ±200ppm/C Molded SMD Paper T/R", Case Code (Imperial)=1206, Case Code (Metric)=3216, Manufacturer="Stackpole Electronics", Max Operating Temperature=155°C, Max Power Dissipation=250mW, Min Operating Temperature=-55°C, Supplier Part Number 1=RMCF1206JT620RCT-ND, Temperature Coefficient=200ppm/°C, Tolerance=5%, Case/Package=1206, Category="Chip SMD Resistors", ComponentLink1Description=https://datasheet.ciiva.com/15193/getdatasheetpartid-659413-15193755.pdf?src-supplier=Verical, ComponentLink1URL=https://datasheet.ciiva.com/15193/getdatasheetpartid-659413-15193755.pdf?src-supplier=Verical, Composition="Thick Film", Contact Plating=Tin,Matte, Depth=1.6mm, Features="Automotive AEC-Q200", Height=0.028inch, Length=0.126inch, Manufacturer Part Number=RMCF1206JT620R, Military Standard=Not, Mount="Surface Mount", Number of Terminations=2, Packaging="Tape and Reel", Pricing 1="1=0.10000, 10=0.02700, 100=0.01100, 1000=0.00496, 2500=0.00430 (USD)", Radiation Hardening=No, Resistance=620R, RoHS=Yes, Stock 1=44910, Supplier 1=Digi-Key, Width=0.063inch
R4 R7 R10: library part CRGP1206F47K, "RS20-0400S4S4SDAPHHXX.X.", Manufacturer="TE Connectivity", Supplier Part Number 1=A130558CT-ND, Category="Chip SMD Resistors", Manufacturer Part Number=CRGP1206F47K, Pricing 1="1=0.31000, 10=0.26500, 100=0.10360, 1000=0.04338, 2500=0.03976 (USD)", RoHS=No, Stock 1=54190, Supplier 1=Digi-Key

## Via types
v1: diameter 0.6, hole 0.3, Top Layer to Bottom Layer, 4 vias

## Nets (pads, with @x,y where several pads share a name; then routed paths per layer and width w, separated by ;. In a path a pad name is that pad's centre, name@x,y a point inside that pad or via, vN(x,y) a via of type N, cw(c..) or ccw(c..) an arc to the next point about the centre after c; other vN are vias at no path point)
3.6V: ADJ.4 C2.2 COMP.4 COMP.6 COMP.8 R1.2 | length 28.3
  Top Layer w0.254: C2.2 10.336,8.126 10.336,10.641 10.439,10.743 10.439,14.185 10.388,14.236 10.388,14.334 9.44,15.282 ADJ.4 9.838,16.23 10.642,16.23 13.19,18.778 15.727,21.315 15.794,21.315 15.941,21.463 16.891,21.463 17.158,21.196 19.431,18.923 ; COMP.6 19.431,18.923 ; COMP.8 20.701,17.653 19.431,18.923
4Vi: COMP.9 P1.2 R9.1 | length 52.1
  Top Layer w0.254: P1.2 6.35,1.778 26.305,1.778 29.608,5.081 29.608,17.509 28.321,18.796 26.67,18.796 24.753,16.879 24.503,16.879 24.13,16.506 R9.1 23.757,16.629 23.757,17.551 22.385,18.923 COMP.9
5V: 5VREG.3 AND.5 J1.2 R4.2 R7.2 R10.2 | length 20.1
  Top Layer w0.254: J1.2 8.494,25.923 10.904,25.923 ; AND.5 10.904,25.923 ; R4.2 R7.2 R10.2 16.942,29.849 16.569,29.476 13.721,29.476 12.862,28.617 5VREG.3 9.666,27.161 10.904,25.923
8Vi: P1.3 R5.1 R8.1 | length 21.5
  Top Layer w0.254: P1.3 3.631,7.112 4.393,6.35 19.613,6.35 21.086,4.877 R5.1 R8.1
12Vi: 5VREG.1 ADJ.3 C1.2 C3.2 C4.2 C5.2 COMP.3 OPAMP.8 P1.4 R6.1 | length 117.2
  Top Layer w0.254: C3.2 3.679,20.244 5.066,21.631 ; COMP.3 8.452,22.733 7.749,22.03 6.938,22.03 6.59,21.682 ADJ.3 6.59,20.482 5.119,19.011 ; C5.2 16.815,38.477 14.652,40.64 8.883,40.64 7.874,39.631 7.874,38.227 6.223,36.576 5.066,35.419 5VREG.1 5.066,21.631 ; OPAMP.8 21.844,14.224 22.733,13.335 23.927,13.335 C1.2 24.181,13.839 24.554,14.212 24.804,14.212 26.162,15.57 26.162,17.145 26.924,17.907 28.321,17.907 29.1,17.128 29.1,5.291 27.556,3.747 18.691,3.747 18.542,3.896 C4.2 18.442,4.877 R6.1 15.752,4.877 15.379,4.504 15.379,3.822 13.843,2.286 7.441,2.286 4.024,5.703 2.552,5.703 2.032,6.223 2.032,8.128 P1.4 3.556,17.448 5.119,19.011 ; 5.066,21.631 5.066,19.064 5.119,19.011
GND: 5VREG.2 5VREG.4 AND.2 C1.1 C2.1 C3.1 C4.1 C5.1 COMP.12 D1.2 OPAMP.4 P1.1 P2.2 R3.1 R12.2 R13.2 | length 2.8
  Top Layer w0.254: 5VREG.4 v1(10.16,34.417)
  other v1: 10.287,3.302 17.78,9.779 25.908,13.589
NetADJ1_1: ADJ.1 R1.1 R3.2 | length 15.4
  Top Layer w0.254: R3.2@7.163,7.95 R1.1 6.884,10.947 6.884,16.79 10.255,20.161 10.842,20.161 11.19,20.509 ADJ.1
NetAND1_1: AND.1 COMP.1 R7.1 | length 15.5
  Top Layer w0.254: COMP.1 13.847,25.273 13.774,25.346 13.415,25.346 13.266,25.495 13.266,26.814 13.606,27.154 13.617,27.154 14.439,27.977 17.9,27.977 19.063,29.139 19.063,31.437 20.142,32.516 R7.1
NetAND1_3: AND.3 COMP.14 R10.1 | length 12.7
  Top Layer w0.254: AND.3 14.125,26.601 14.478,26.601 15.182,27.305 18.161,27.305 20.142,29.286 ; R10.1 20.142,29.286 ; COMP.14 21.844,25.339 21.844,27.305 20.142,29.007 20.142,29.286
NetAND1_4: AND.4 COMP.2 R4.1 | length 20.5
  Top Layer w0.254: AND.4 11.925,26.545 12.347,26.545 12.728,26.164 ; COMP.2 14.039,24.003 12.728,25.314 12.728,26.164 ; R4.1 20.142,35.183 18.288,33.329 18.288,29.083 17.78,28.575 14.319,28.575 13.406,27.662 13.396,27.662 12.758,27.024 12.758,27.014 12.728,26.984 12.728,26.164
NetAND1_6: AND.6 J1.1 | length 5
  Top Layer w0.254: J1.1 7.432,24.085 7.705,24.358 8.266,24.358 9.181,25.273 AND.6
NetCOMP1_5: COMP.5 OPAMP.1 R2.2 | length 8.4
  Top Layer w0.254: R2.2 13.966,15.951 R2.2@14.224,15.693 ; OPAMP.1@15.555,14.224 15.382,14.397 15.382,14.535 15.354,14.563 R2.2@14.224,15.693 ; COMP.5 16.035,20.193 14.224,18.382 R2.2@14.224,15.693
NetCOMP1_7: COMP.7 OPAMP.7 R11.1 | length 11.4
  Top Layer w0.254: COMP.7@16.477,17.62 COMP.7 16.871,17.653 17.031,17.493 17.031,16.878 20.955,12.954 OPAMP.7 21.811,12.954 21.971,12.794 21.971,12.632 23.554,11.049 R11.1 R11.1@24.435,11.299
NetOPAMP1_2: OPAMP.2 R2.1 R5.2 | length 10
  Top Layer w0.254: R2.1 13.919,12.954 OPAMP.2 16.096,12.888 16.83,12.888 20.713,9.005 20.713,8.45 21.086,8.077 R5.2
NetOPAMP1_3: OPAMP.3 R6.2 R12.1 | length 8
  Top Layer w0.254: R6.2 13.335,8.077 13.208,7.95 13.208,9.337 15.555,11.684 OPAMP.3
NetOPAMP1_5: OPAMP.5 R8.2 R13.1 | length 6.4
  Top Layer w0.254: OPAMP.5 23.394,8.45 23.757,8.45 24.257,7.95 R13.1@26.797,7.95
NetOPAMP1_6: OPAMP.6 R9.2 R11.2 | length 14.5
  Top Layer w0.254: OPAMP.6 21.905,11.684 24.191,9.398 27.178,9.398 27.635,9.855 27.635,11.299 28.448,12.112 28.448,14.351 27.559,15.24 27.559,16.027 R9.2
TO_RELAY: D1.1 J1.3 P2.1 | length 24.8
  Top Layer w0.254: P2.1 9.144,37.731 11.886,34.989 12.079,34.989 12.827,34.241 D1.1 12.827,33.341 12.079,32.593 9.253,32.593 6.223,29.563 6.223,23.855 6.874,23.204 7.99,23.204 8.498,23.712 9.059,23.712 9.332,23.985 J1.3
pads on no net: ADJ.2 COMP.10 COMP.11 COMP.13

## Polygon pours and split planes (outlines as drawn)
GND on Bottom Layer "GND_L01_P-001" (solid, pour order 1): 0,42.545 0,40.894 0,0 30.734,0 30.734,42.545
GND on Top Layer "GND_L01_P-001" (solid, remove dead copper, pour order 0): 5.08,42.545 0,42.545 0,0 30.734,0 30.734,42.545 14.224,42.545

## Silkscreen, mask and mechanical layers (free items; w line width, h text height)
Top Overlay:
  text "12V" at 2.005,8.626 h0.8 r91.64
  text "8V" at 1.912,6.343 h0.8 r90
  text "4V" at 1.912,4.057 h0.8 r90
  text "GND" at 1.91,1.007 h0.8 r90.88